# Altium PCB USB-C-PCB.PcbDoc
Units mm, origin at the board's own origin, x right, y up, seen from the top; angles counter-clockwise.
Board outline 11.75 x 24 mm, 2 copper layers (Top Layer, Bottom Layer), stack 1.492 mm thick; 2 components, 6 nets, 40 pads, 1 vias.
Unrouted connection lines stored in the file: 13.
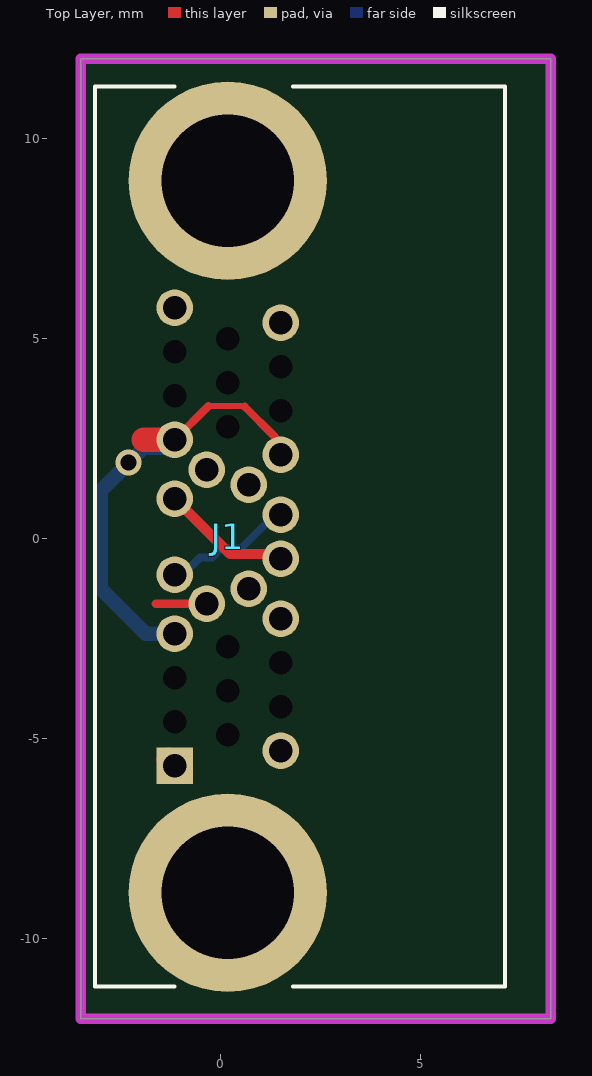
[diagram p0: Top Layer view]
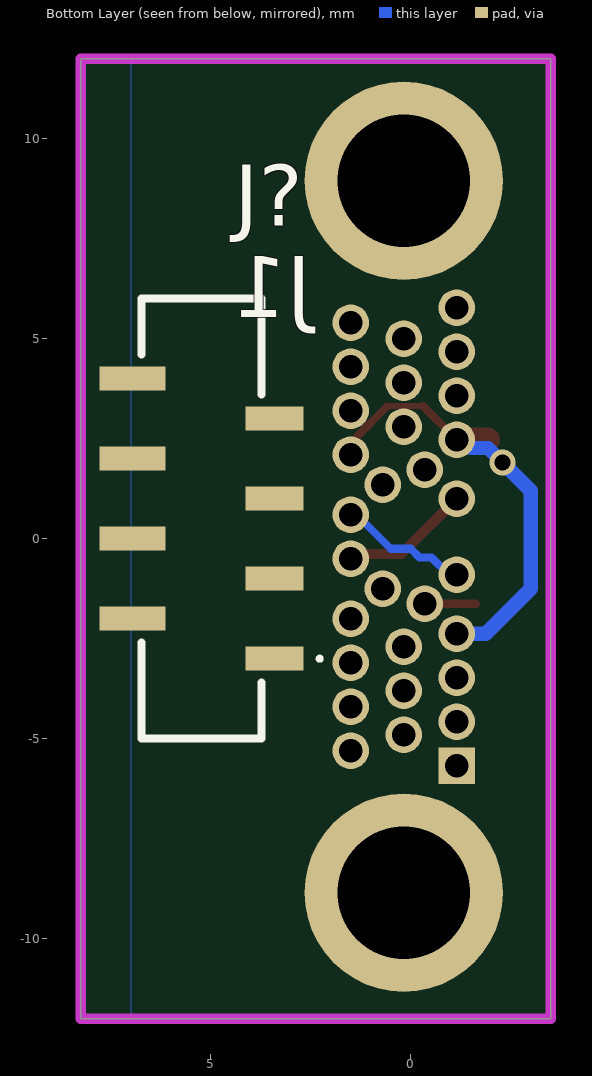
[diagram p1: Bottom Layer view, seen from below]

## Layer stack, top to bottom
Top Solder: solder mask 0.0254, SM-001, Dk 4
Top Layer: signal copper 0.035
Dielectric 1: core 1.4224, Core-043, Dk 4.3
Bottom Layer: signal copper 0.035
Bottom Solder: solder mask 0.0254, SM-001, Dk 4

## Board outline
-3.5,-12 -3.5,12 8.25,12 8.25,-12

## Design rules (kind name [scope] priority, off if disabled: settings)
Clearance [All] p1: gap=0.254 ignorepadtopadclearanceinfootprint=FALSE except(0: Arc-Hole Track-Hole SMDPad-Hole THPad-Hole Via-Hole Fill-Hole Poly-Hole Region-Hole Text-Hole; 0.152: Arc-Arc Arc-Track Arc-SMDPad Arc-THPad Track-Track Track-SMDPad Track-THPad; 0.203: SMDPad-SMDPad SMDPad-THPad THPad-THPad)
PolygonConnect [All] p1: connectstyle=Relief reliefconductorwidth=0.254 reliefentries=4 polygonreliefangle="90 Angle" airgapwidth=0.254
RoutingVias [All] p1: holewidth=0.711 width=1.27 viastyle="Through Hole" minholewidth=0.711 minwidth=1.27 maxholewidth=0.711 maxwidth=1.27
SolderMaskExpansion [All] p1: expansion=0.102 istentingtop=FALSE
Width [All] p1: maxlimit=0.508 minlimit=0.152 preferedwidth=0.152
30 further rules are at their usual default settings.

## Components (designator, comment, footprint, x,y, rotation, side; value= is the part's Value field where it differs from the comment)
J1 "MUSBRM1C1M0" MUSBRM1C1M0 -1.15,-5.675 r90 top
J? "0528080871" 0528080871 5.225,0.5 r90 bottom

## Footprints (in the part's own frame and the unit in brackets; to place one, negate y for a bottom-side part, rotate by r counter-clockwise, add the part's x,y. Pads: shape width x height; smd on the part's side, far side on the other; paste and mask are expansions set on the pad)
0528080871 [mm]
  rect 0.6x1.45 smd: 1(-3.5,-1.825) 3(-1.5,-1.825) 5(0.5,-1.825) 7(2.5,-1.825)
  rect 0.6x1.65 smd: 2(-2.5,1.725) 4(-0.5,1.725) 6(1.5,1.725) 8(3.5,1.725)
  silkscreen extent -5.5,-3 5.5,1.5, body extent -5.5,-2.49 5.5,2.49, height 5.4
MUSBRM1C1M0 [mm]
  rect 0.914x0.914 hole 0.58: A1(0,0)
  round 0 / inner round 0.914 / far side round 0.914 hole 0.58: A2(1.1,0) A3(2.2,0) A10(9.25,0) A11(10.35,0) B2(9.975,-2.65) B3(8.875,-2.65) B10(2.575,-2.65) B11(1.475,-2.65) G1(0.775,-1.325) G2(1.875,-1.325) G3(2.975,-1.325) G4(8.475,-1.325) G5(9.575,-1.325) G6(10.675,-1.325)
  round 0.914 hole 0.58: A4(3.3,0) A5(4.05,-0.8) A6(4.775,0) A7(6.675,0) A8(7.4,-0.8) A9(8.15,0) A12(11.45,0) B1(11.075,-2.65) B4(7.775,-2.65) B5(7.025,-1.85) B6(6.275,-2.65) B7(5.175,-2.65) B8(4.425,-1.85) B9(3.675,-2.65) B12(0.375,-2.65)
  round 4.957 hole 3.305: SG1(-3.175,-1.325) SG2(14.625,-1.325)
  silkscreen extent -5.53,-8.25 16.98,1.99, body extent -6.04,-13.17 17.46,1.78, height 8.4

## Part data
J1: "Connector", Manufacturer_Name=Amphenol, Mouser Part Number=523-MUSBRM1C1M0, Arrow Part Number=MUSBRM1C1M0, Arrow Price/Stock=https://www.arrow.com/en/products/musbrm1c1m0/amphenol-fci?region=europe, Datasheet Link=http://www.amphenol-icc.com/media/wysiwyg/files/drawing/musbrm1c1xx.pdf, Height=6.15mm, Manufacturer_Part_Number=MUSBRM1C1M0, Mouser Price/Stock=https://www.mouser.co.uk/ProductDetail/Amphenol-Commercial-Products/MUSBRM1C1M0?qs=z4I1WACWgPTQVfMzr4eSOQ%3D%3D
J?: "Connector", Manufacturer_Name=Molex, Arrow Part Number=0528080871, Arrow Price/Stock=https://www.arrow.com/en/products/0528080871/molex, Datasheet Link=https://www.molex.com/pdm_docs/sd/528080871_sd.pdf, Height=5.3mm, Manufacturer_Part_Number=0528080871

## Via types
v1: diameter 0.65, hole 0.4, Top Layer to Bottom Layer, tented both sides, 1 vias

## Nets (pads, with @x,y where several pads share a name; then routed paths per layer and width w, separated by ;. In a path a pad name is that pad's centre, name@x,y a point inside that pad or via, vN(x,y) a via of type N, cw(c..) or ccw(c..) an arc to the next point about the centre after c; other vN are vias at no path point)
CC1: J1.A5 J?.3 | length 1.4
  Top Layer w0.203: -1.625,-1.625 J1.A5
  Bottom Layer w0.254: J1.A5 J1.A5@-0.279,-1.554
CC2: J1.B5 J?.4
D+: J1.A6 J1.B6 J?.5 | length 3.4
  Top Layer w0.356: J1.A6@-1.22,-0.97 J1.A6
  Bottom Layer w0.203: J1.A6@-0.954,-0.9 -0.522,-0.469 -0.219,-0.469 0,-0.25 0.5,-0.25 J1.B6@1.35,0.6
  Bottom Layer w0.254: J1.A6 J1.A6@-0.954,-0.9 ; J1.B6@1.35,0.6 J1.B6
D-: J1.A7 J1.B7 J?.7 | length 3.4
  Top Layer w0.254: J1.A7 0.229,-0.379 1.379,-0.379 J1.B7
  Top Layer w0.356: J1.A7@-1.257,0.893 J1.A7
GND: J1.A1 J1.A12 J1.B1 J1.B12 J1.SG1 J1.SG2 J?.1 J?.2 | length 0.2
  Top Layer w0.61: J1.A1@-1.302,-5.523 J1.A1
VBUS: J1.A4 J1.A9 J1.B4 J1.B9 J?.6 J?.8 | length 11.6
  Top Layer w0.152: -0.306,3.319 0.581,3.319 0.6,3.3 ; 1.354,2.546 1.354,2.246 J1.B4
  Top Layer w0.203: J1.A9 -0.306,3.319 ; 0.6,3.3 1.354,2.546
  Top Layer w0.61: -1.925,2.475 J1.A9
  Bottom Layer w0.356: J1.A4 -1.875,-2.375 -3,-1.25 -3,1.2 v1(-2.3,1.9) -1.932,2.268 -1.509,2.268 -1.301,2.475 J1.A9
pads on no net: J1.A2 J1.A3 J1.A8 J1.A10 J1.A11 J1.B2 J1.B3 J1.B8 J1.B10 J1.B11 J1.G1 J1.G2 J1.G3 J1.G4 J1.G5 J1.G6

## Polygon pours and split planes (outlines as drawn)
GND on Top Layer "GND_L01_P001" (none, pour order 1): -3.425,12.1 8.25,12.1 8.25,-11.9 -3.425,-11.9
GND on Bottom Layer "GND_L02_P000" (none, pour order 0): -3.5,12 7,12 7,-12 -3.5,-12
no net on Layer0 "Default Coverlay 1 Top" (split plane): -4.6,0.8 -3.5,1.9 -3.5,-10 -4,-9.5 -4.6,-9.5
no net on Layer0 "Default Coverlay 1 Bottom" (split plane): -4.6,0.8 -3.5,1.9 -3.5,-10 -4,-9.5 -4.6,-9.5

## Keep-outs
Keep-Out Layer:
  lines w0.254: -3.5,-12 -3.5,-10 -3.5,12 5,12 8.25,12 8.25,-12 -3.5,-12